# Altium PCB SpaceVNXBaseBoard.PcbDoc
Units mm, origin at the board's own origin, x right, y up, seen from the top; angles counter-clockwise.
Board outline 73 x 84 mm, 2 copper layers (Top Layer, Bottom Layer); 7 components, 0 nets, 8 pads, 0 vias.
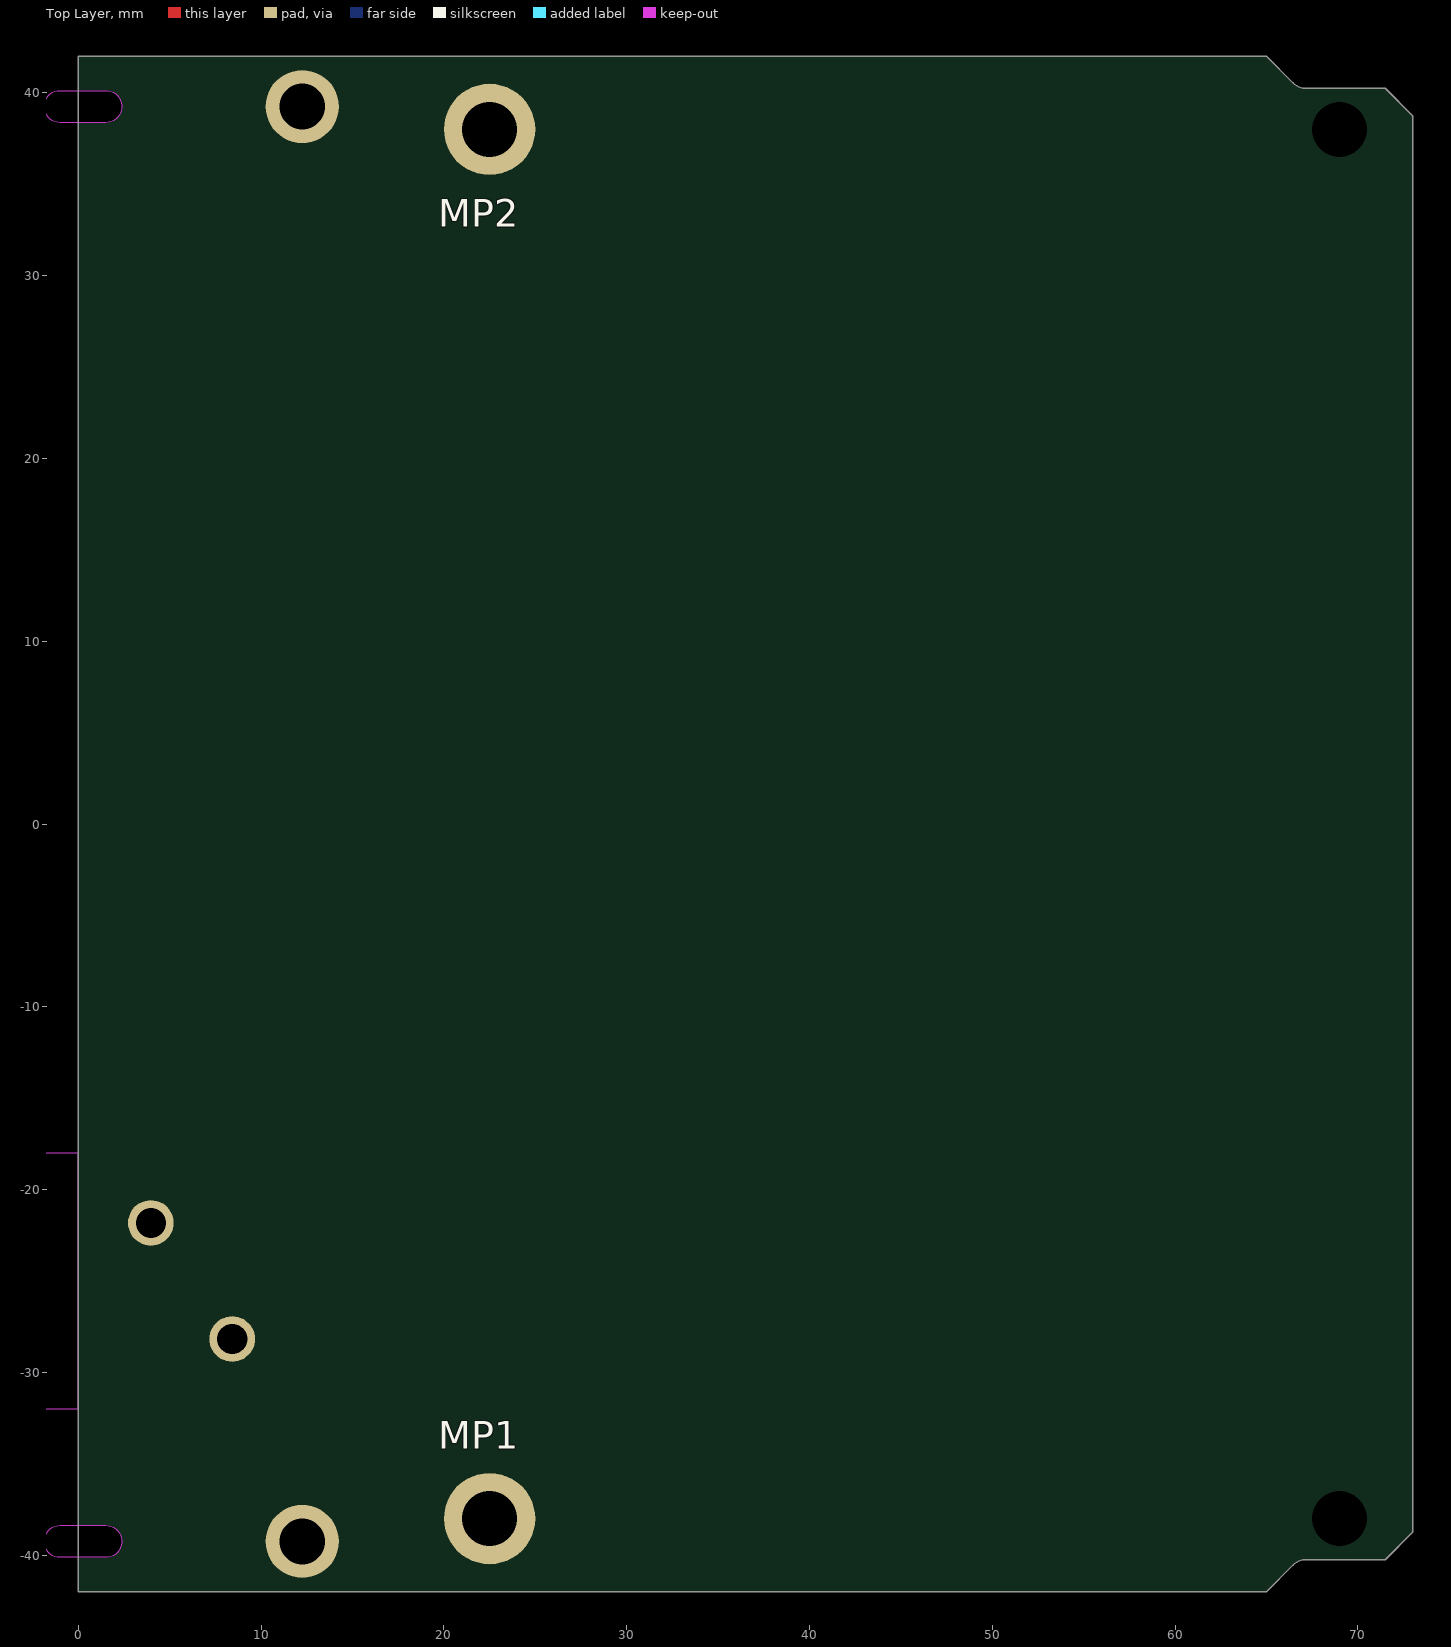
[diagram p0: Top Layer view]
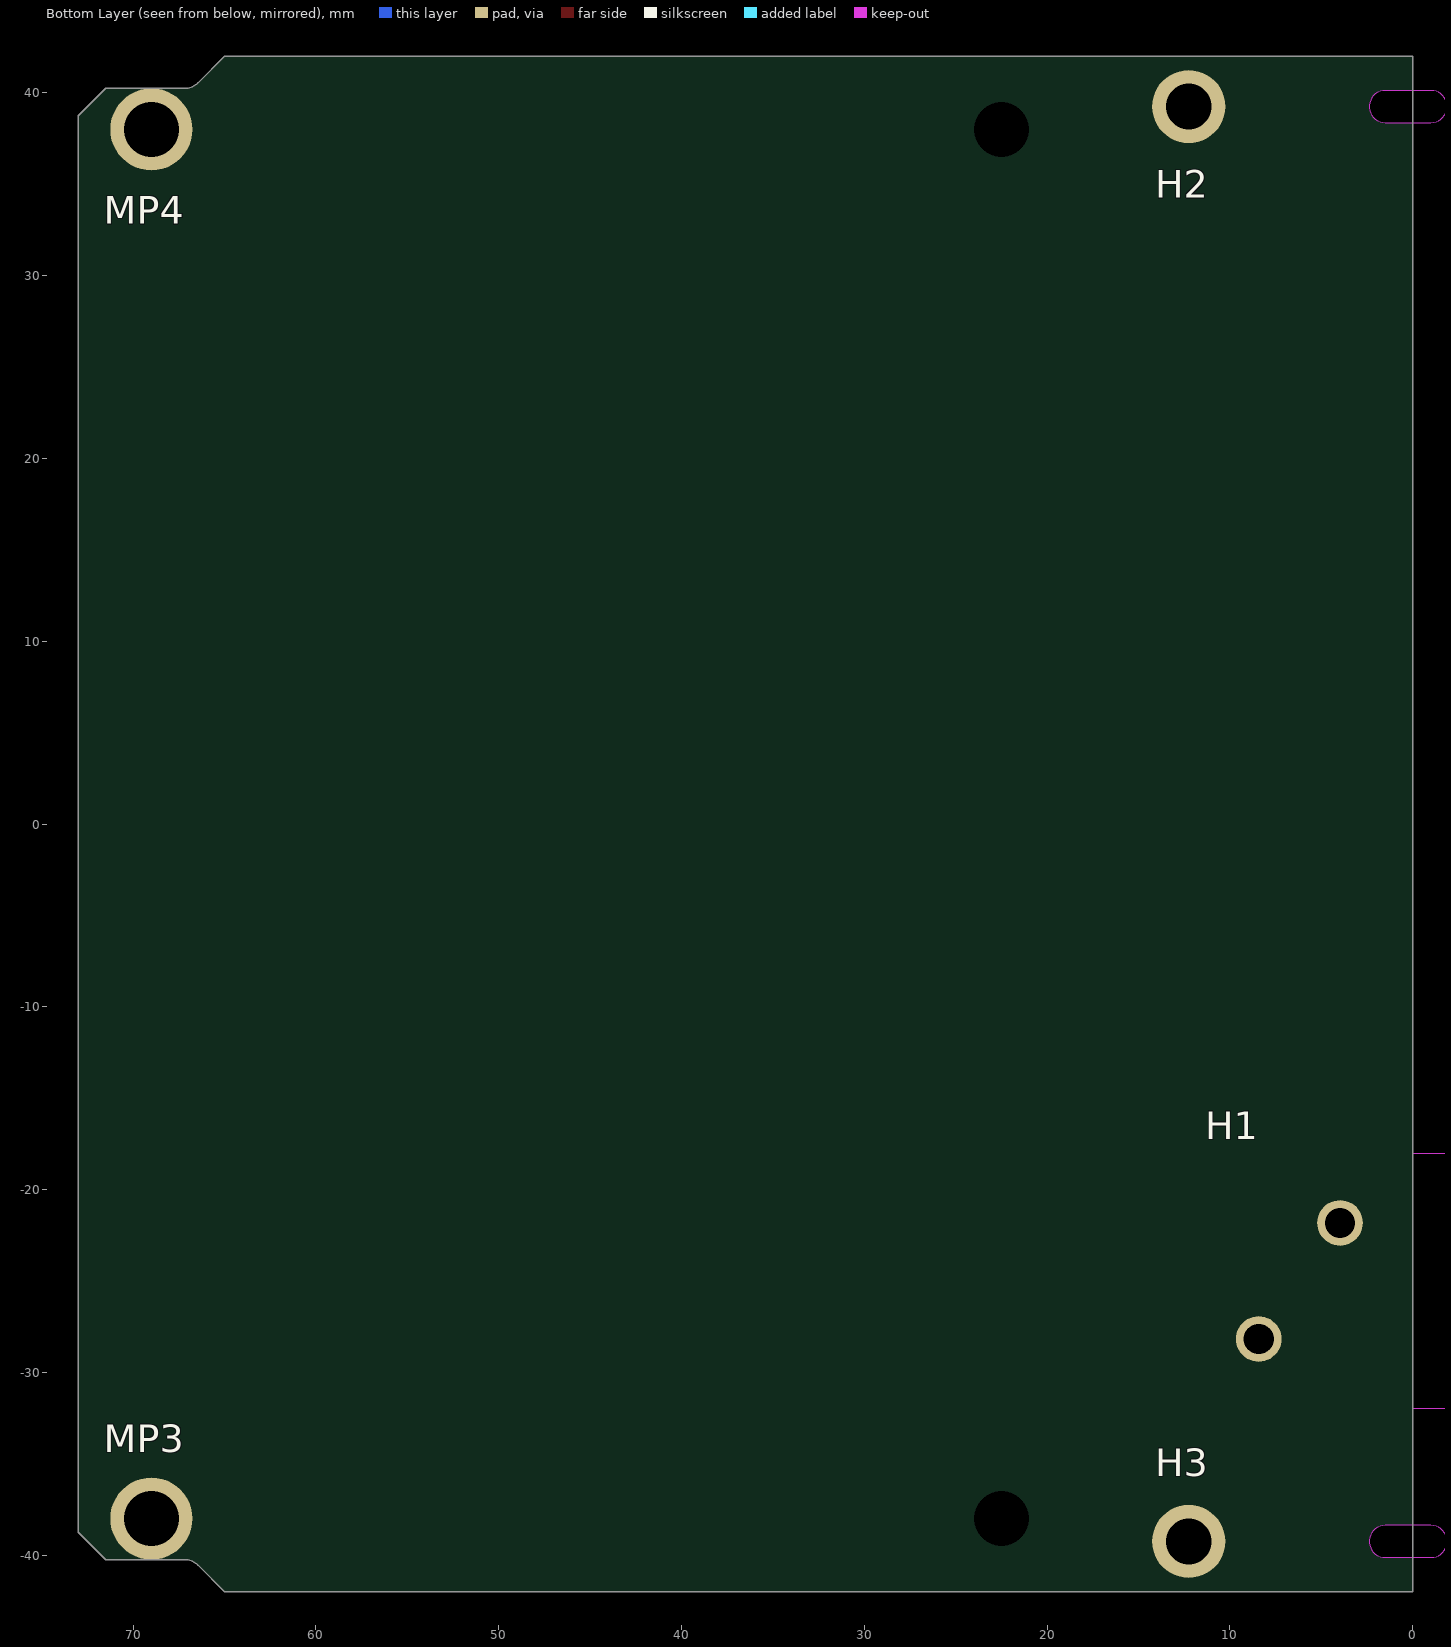
[diagram p1: Bottom Layer view, seen from below]

## Layer stack, top to bottom
Top Solder: solder mask 0.0102, Solder Resist, Dk 3.5
Top Layer: signal copper 0.0356
Dielectric 1: dielectric 0.32, FR-4, Dk 4.8
Bottom Layer: signal copper 0.0356
Bottom Solder: solder mask 0.0102, Solder Resist, Dk 3.5

## Board outline
0,-42 0,42 65,42 66.457,40.543 ccw(c67.164,41.25) 67.164,40.25 71.5,40.25 73,38.75 73,-38.75 71.5,-40.25 67.164,-40.25 ccw(c67.164,-41.25) 66.457,-40.543 65,-42

## Design rules (kind name [scope] priority, off if disabled: settings)
Clearance [All] p1: gap=0.254 ignorepadtopadclearanceinfootprint=FALSE except(0: Arc-Hole Track-Hole SMDPad-Hole THPad-Hole Via-Hole Fill-Hole Poly-Hole Region-Hole Text-Hole)
PolygonConnect [All] p1: connectstyle=Relief reliefconductorwidth=0.254 reliefentries=4 polygonreliefangle="90 Angle" airgapwidth=0.254
RoutingVias [All] p1: holewidth=0.711 width=1.27 viastyle="Through Hole" minholewidth=0.711 minwidth=1.27 maxholewidth=0.711 maxwidth=1.27
SolderMaskExpansion [All] p1: expansion=0.102 istentingtop=FALSE
Width [All] p1: maxlimit=0.254 minlimit=0.254 preferedwidth=0.254
30 further rules are at their usual default settings.

## Components (designator, comment, footprint, x,y, rotation, side; value= is the part's Value field where it differs from the comment)
H1 "SF9321-60015" SF9321-60015 0,-25 r90 bottom locked
H2 "Guide Pin Receptacle" "Guide Pin Receptacle" 0,39.25 r0 bottom locked
H3 "Guide Pin Receptacle" "Guide Pin Receptacle" 0,-39.25 r0 bottom locked
MP1 "M3x5.1mm" 9775051360 22.5,-38 r0 top locked
MP2 "M3x5.1mm" 9775051360 22.5,38 r0 top locked
MP3 "M2x5mm" 9774050243 69,-38 r180 bottom locked
MP4 "M2x5mm" 9774050243 69,38 r180 bottom locked

## Footprints (in the part's own frame and the unit in brackets; to place one, negate y for a bottom-side part, rotate by r counter-clockwise, add the part's x,y. Pads: shape width x height; smd on the part's side, far side on the other; paste and mask are expansions set on the pad)
9774050243 [mm] "SMT Steel Spacer with internal Thread M2, height 5mm"
  round 4.5 / inner round 0 / far side round 0 hole 3 unplated: 1(0,0)
  body extent -2.17,-2.16 2.18,2.16, height 5
9775051360 [mm] "SMD Steel Spacer M3 Thread Internal, Pin Length 5.1mm"
  round 5 / inner round 0 / far side round 0 hole 3 unplated paste-403.566: 1(0,0)
  body extent -3,-3 3,3, height 1
"Guide Pin Receptacle" [mm] "Guide Pin Receptacle"
  round 4 hole 2.5: S2(12.25,0)
  Keep-Out Layer board cut-out: -1,-0.877 1.5,-0.877 1.881,-0.79 2.186,-0.547 2.355,-0.195 2.355,0.195 2.186,0.547 1.881,0.79 1.5,0.877 1.5,0.877 -1,0.877 -1.381,0.79 -1.686,0.547 -1.855,0.195 -1.855,-0.195 -1.686,-0.547 -1.381,-0.79 -1,-0.877
  body extent 0,-2.79 14.25,2.71, height 6.93
SF9321-60015 [mm]
  round 2.5 hole 1.65: S2(-3.175,8.42) S2(3.175,3.97)
  Keep-Out Layer board cut-out: -7,-10 -7,0 7,0 7,-10
  body extent -6.96,-10 6.96,11.59, height 14.91

## Part data
H1: "RF Connector SMPM Connector VITA 67.1", Supplier Part Number 1=SF9321-60015-ND, Supplier 1=Digi-Key, Supplier 2=Mouser, Supplier Part Number 2=523-SF9321-60015
H2 H3: "Keyed Guide Right Angle Receptacle", Supplier Part Number 1=10037912-119LF, Supplier 1=Avnet
MP1 MP2: library part 9775051360, "WA-SMSR SMT Steel Spacer Reverse with internal Thread M3, Length 5.1mm", Manufacturer="Wurth Elektronik", Operating Temperature="-55 to +150degC", ComponentLink1Description=Manufacturer, ComponentLink1URL=http://www.we-online.de, ComponentLink2Description=Datasheet, ComponentLink2URL=https://www.we-online.com/catalog/datasheet/9775051360.pdf, Hole Diameter=-, Inner Diameter=4.2mm, Manufacturer Part Number=9775051360, Material=Steel, Mounting Technology=SMT, Outer Diameter=6mm, Packaging=Bulk, Pin Length=5.1mm, Published Date="March 2021", Surface=Tin, Thread=M3
MP3 MP4: library part 9774050243, "WA-SMSI SMT Steel Spacer, internal Thread, OD 4.35mm, M2x5mm", Manufacturer="Wurth Elektronik", Operating Temperature="-55 to +150degC", ComponentLink1Description=Manufacturer, ComponentLink1URL=http://www.we-online.de, ComponentLink2Description=Datasheet, ComponentLink2URL=https://www.we-online.com/catalog/datasheet/9774050243.pdf, Inner Diameter=2.8mm, Inner Thread Length=-, Length=5mm, Manufacturer Part Number=9774050243, Material=Steel, Mounting Technology=SMT, Outer Diameter=4.35mm, Packaging=Bulk, Published Date="April 2020", Surface=Tin, Thread=M2

## Nets (pads, with @x,y where several pads share a name; then routed paths per layer and width w, separated by ;. In a path a pad name is that pad's centre, name@x,y a point inside that pad or via, vN(x,y) a via of type N, cw(c..) or ccw(c..) an arc to the next point about the centre after c; other vN are vias at no path point)
pads on no net: H1.S2 H2.S2 H3.S2 MP1.1 MP2.1 MP3.1 MP4.1

## Silkscreen, mask and mechanical layers (free items; w line width, h text height)
Mechanical 1:
  the board outline again, w0.013